# Altium PCB TinyTOF-Body.PcbDoc (part 2 of 3)
Units mil, origin at the board's own origin, x right, y up, seen from the top; angles counter-clockwise.
Board outline 6000 x 4000 mil, 6 copper layers (Component Side, Ground Plane (GND), Inner Layer 1, Inner Layer 2, Power Plane (VCC), Solder Side), stack 62.6 mil thick; 146 components, 158 nets, 1020 pads, 350 vias.
Unrouted connection lines stored in the file: 339.
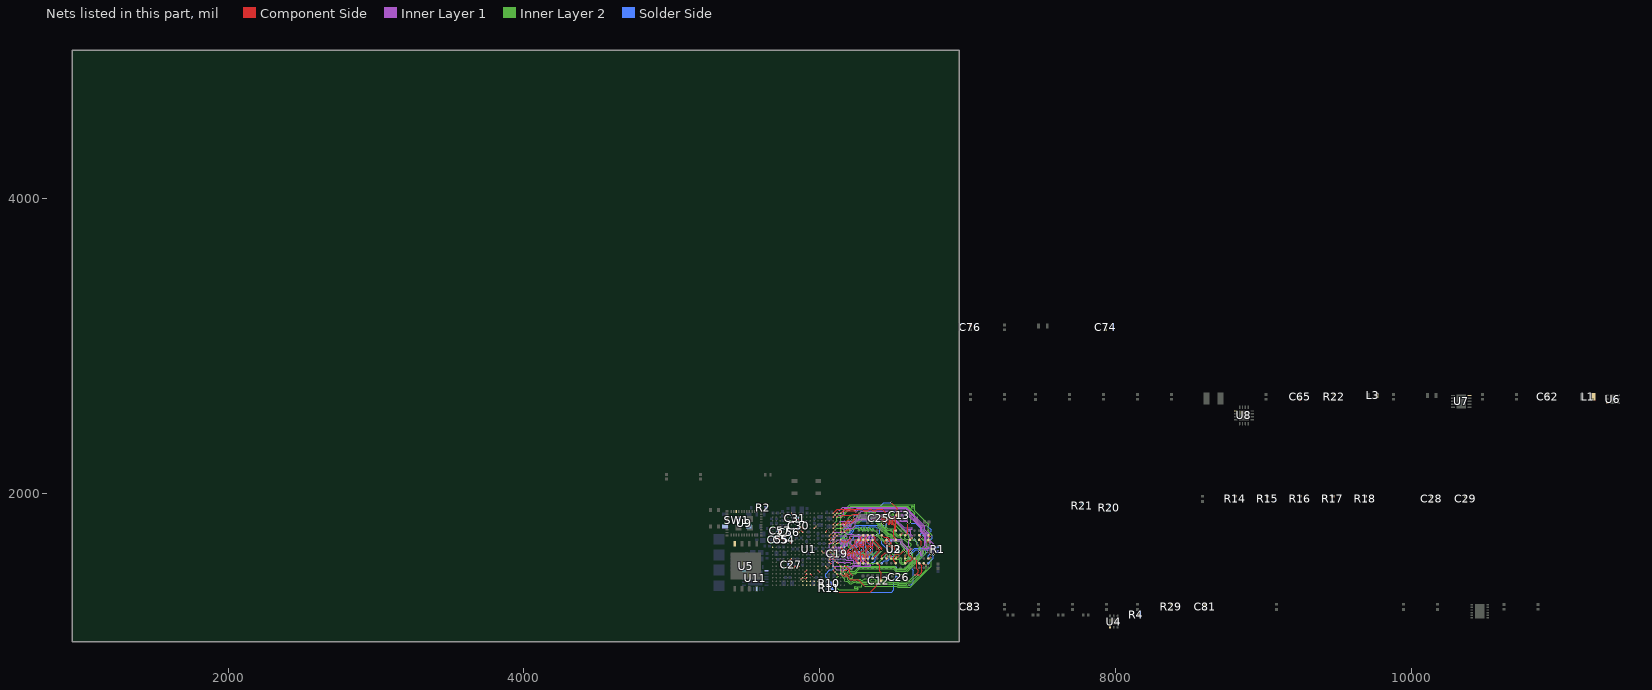
[diagram p6: the nets of this part, all layers, seen from the top]

## Via types
v1: diameter 12, hole 6, Component Side to Solder Side, tented both sides, 330 vias
v2: diameter 19.68, hole 7.87, Component Side to Solder Side, 12 vias
v3: diameter 19.68, hole 11.81, Component Side to Solder Side, 5 vias
v4: diameter 12, hole 6, Component Side to Solder Side, 3 vias

## Nets (pads, with @x,y where several pads share a name; then routed paths per layer and width w, separated by ;. In a path a pad name is that pad's centre, name@x,y a point inside that pad or via, vN(x,y) a via of type N, cw(c..) or ccw(c..) an arc to the next point about the centre after c; other vN are vias at no path point) (continued)
2V5: C54.2 C55.2 U1.K7 U1.N17 U1.N18 | length 54.3
  Component Side w5: v1(5720.27,1701.77) U1.N18@5733.07,1688.98 ; v1(5745.87,1701.77) U1.N17@5758.66,1688.98 ; U1.K7@6014.57,1612.2 v1(6027.36,1599.41)
3V3: C56.2 C57.2 C62.2 C76.2 L1.2 R2.2 R4.2 R22.2 SW1.1 SW1.2 U1.P17 U1.P18 U1.R18 U4.1 U6.3 U8.13 U9.30 | length 54.3
  Component Side w5: v1(5720.27,1727.36) U1.P18@5733.07,1714.57 ; v1(5720.27,1752.95) U1.R18@5733.07,1740.16 ; v1(5745.87,1727.36) U1.P17@5758.66,1714.57
3V3_SLOW: C27.2 C28.2 C29.2 C30.2 C31.2 C65.1 C74.1 C81.2 C83.2 L3.2 R14.2 R15.2 R16.2 R17.2 R18.2 R20.2 R21.2 R29.2 U1.E11 U1.F6 U1.F8 U1.F13 U1.F14 U1.F15 U1.G15 U1.H15 U1.L20 U1.M15 U1.N19 U1.R6 U1.R12 U1.R13 U1.T9 U1.T12 U1.V13 U1.Y15 U5.8 U7.10 U9.36 U11.1 U11.9 U11.18 | length 253.3
  Component Side w5: v1(5797.05,1497.05) U1.F15@5809.84,1509.84 ; v1(5797.05,1522.64) U1.G15@5809.84,1535.43 ; v1(5797.05,1548.23) U1.H15@5809.84,1561.02 ; v1(5797.05,1676.18) U1.M15@5809.84,1663.39 ; v1(5822.64,1497.05) U1.F14@5835.43,1509.84 ; v1(5848.23,1497.05) U1.F13@5861.02,1509.84 ; v1(5848.23,1752.95) U1.R13@5861.02,1740.16 ; v1(5848.23,1829.73) U1.V13@5861.02,1816.93 ; v1(5873.82,1752.95) U1.R12@5886.61,1740.16 ; v1(5873.82,1778.54) U1.T12@5886.61,1765.75 ; v1(5899.41,1471.46) U1.E11@5912.2,1484.25 ; U1.T9@5963.39,1765.75 v1(5976.18,1778.54) ; U1.F6@6040.16,1509.84 v1(6052.95,1497.05) ; U1.R6@6040.16,1740.16 v1(6052.95,1752.95)
CSI_D0: U1.D10 | length 18.1
  Component Side w5: U1.D10@5937.8,1458.66 v1(5950.59,1445.87)
CSI_D1: U1.B8
CSI_D2: U1.C11 | length 18.1
  Component Side w5: v1(5899.41,1420.27) U1.C11@5912.2,1433.07
CSI_D3: U1.A9
CSI_D4: U1.A11
CSI_D5: U1.D11 | length 18.1
  Component Side w5: v1(5899.41,1445.87) U1.D11@5912.2,1458.66
CSI_D6: U1.B9
CSI_D7: U1.A12
CSI_D8: U1.A10
CSI_D9: U1.C12 | length 18.1
  Component Side w5: v1(5873.82,1420.27) U1.C12@5886.61,1433.07
CSI_D10: U1.E8 | length 18.1
  Component Side w5: U1.E8@5988.98,1484.25 v1(6001.77,1471.46)
CSI_D11: U1.A7
CSI_HSYNC: U1.B12
CSI_PIXCLK: U1.B11
CSI_VSYNC: U1.B10
DDR_VREF: C12.2 C13.2 C19.2 C25.2 C26.2 R10.1 R11.2 U1.K4 U2.H1 U2.M8 U3.H1 U3.M8 | length 2425.8
  Component Side w5: U1.K4@6091.34,1612.2 v1(6104.13,1599.41) ; v4(6110,1335) 6341.14,1335 C12.2@6416.14,1410 6416.14,1466.18 6406.49,1475.83 6406.49,1513.78 U2.M8@6389.76,1530.51 ; v4(6485,1940) 6523.86,1901.14 C13.2@6523.86,1855 6515.75,1846.89 6515.75,1785.41 6516.5,1784.66 6516.5,1751.74 U2.H1@6515.75,1750.98
  Solder Side w5: U3.M8@6389.76,1719.49 6406.49,1736.22 6406.49,1757.1 6424.14,1774.75 6442.43,1774.75 6453.5,1785.82 6453.5,1802.64 6437.28,1818.86 C25.2@6400,1818.86 6313.86,1818.86 ; v4(6485,1940) 6435,1940 6313.86,1818.86 ; U3.H1@6515.75,1499.02 6519,1495.76 6519,1435.14 C26.2@6518.86,1435 6502.5,1418.64 6502.5,1349.82 6487.68,1335 v4(6110,1335) 6085,1360 R11.2@6082.72,1360 R10.1@6082.72,1395 6040,1437.72 6040,1455 6069.55,1484.55 6083.72,1484.55 6091.04,1491.87 6091.04,1582.19 C19.2@6103.86,1595 6121.53,1612.67 6134.27,1612.67 6145,1623.41 6145,1722.68 6241.18,1818.86 6313.86,1818.86
DRAM_A0: U1.N5 U2.N3 U3.N3 | length 623.1
  Component Side w5: U1.N5@6065.75,1688.98 v1(6078.54,1701.77) ; U2.N3@6358.27,1687.99 6358.27,1669.46 6360.36,1667.36 6390,1637.73 v1(6390,1615)
  Inner Layer 2 w5: v1(6078.54,1701.77) 6091.63,1688.68 6091.63,1620.27 ccw(c6100,1620.27) 6100,1611.91 ccw(c6100,1616.91) 6105,1616.91 6105,1633.09 cw(c6110,1633.09) 6110,1638.09 cw(c6110,1633.09) 6115,1633.09 6115,1616.91 ccw(c6120,1616.91) 6120,1611.91 6134.9,1611.91 6146.81,1600 6295.32,1600 6300,1595.32 6320,1595.32 6324.68,1600 6350,1600 6354.68,1595.32 6370.32,1595.32 v1(6390,1615)
  Solder Side w5: U3.N3@6358.27,1562.01 6358.27,1583.27 v1(6390,1615)
DRAM_A1: U1.P5 U2.P7 U3.P7 | length 648.2
  Component Side w5: U1.P5@6065.75,1714.57 v1(6078.54,1727.36) ; U2.P7@6326.77,1562.01 6326.77,1581.77 v1(6360,1615)
  Inner Layer 1 w5: v1(6078.54,1727.36) 6091.18,1740 6173.92,1740 6187.42,1726.5 6226.23,1726.5 6231.23,1721.5 6323.5,1721.5 cw(c6323.5,1715) 6330,1715 6330,1705 ccw(c6335,1705) 6335,1700 ccw(c6335,1705) 6340,1705 6340,1715 cw(c6345,1715) 6345,1720 cw(c6345,1715) 6350,1715 6350,1705 ccw(c6355,1705) 6355,1700 ccw(c6355,1705) 6360,1705 6360,1715 cw(c6365,1715) 6365,1720 cw(c6365,1715) 6370,1715 6370,1695 cw(c6365,1695) 6365,1690 ccw(c6365,1685) 6360,1685 v1(6360,1615)
  Solder Side w5: U3.P7@6326.77,1687.99 6326.77,1668.23 6360,1635 v1(6360,1615)
DRAM_A2: U1.M4 U2.P3 U3.P3 | length 649.3
  Component Side w5: U1.M4@6091.34,1663.39 v1(6104.13,1676.18) ; U2.P3@6326.77,1687.99 6320,1681.22 6320,1675 6325,1670 6345,1670 6350,1665 6350,1660 6345,1655 6335,1655 6330,1650 6330,1647.73 6332.73,1645 6355,1645 6360,1640 6360,1635 6355,1630 v1(6345,1630)
  Inner Layer 1 w5: v1(6104.13,1676.18) 6107.63,1679.68 6117.23,1679.68 6117.23,1681.36 6124.55,1688.68 6196.36,1688.68 6204.82,1697.14 6204.82,1710.18 6212.14,1717.5 6222.5,1717.5 6227.5,1712.5 6312.5,1712.5 cw(c6312.5,1705) 6320,1705 cw(c6315,1705) 6315,1700 6310,1700 ccw(c6310,1695) 6305,1695 ccw(c6310,1695) 6310,1690 6340,1690 cw(c6340,1685) 6345,1685 v1(6345,1630)
  Solder Side w5: U3.P3@6326.77,1562.01 6332.01,1562.01 6340,1570 6340,1575 6325,1590 6325,1595 6330,1600 6335,1600 6345,1590 6350,1590 6355,1595 6355,1600 6345,1610 v1(6345,1630)
DRAM_A3: U1.K5 U2.N2 U3.N2 | length 622.4
  Component Side w5: U1.K5@6065.75,1612.2 v1(6078.54,1599.41) ; U2.N2@6358.27,1719.49 6375,1702.76 6375,1694.12 6375,1677.28 6409.77,1642.5 6410.18,1642.5 6417.5,1635.18 6417.5,1634.77 6420,1632.27 v1(6420,1615)
  Inner Layer 2 w5: v1(6078.54,1599.41) 6091.63,1586.32 6358.68,1586.32 6365,1580 6385,1580 v1(6420,1615)
  Solder Side w5: U3.N2@6358.27,1530.51 6375,1547.24 6375,1568.12 6420,1613.13 v1(6420,1615)
DRAM_A4: U1.H5 U2.P8 U3.P8 | length 655.9
  Component Side w5: U1.H5@6065.75,1561.02 v1(6078.54,1548.23) ; v1(6315,1630) 6315,1585 6310,1580 6310,1568.17 6310.04,1568.12 6310.04,1547.24 U2.P8@6326.77,1530.51
  Inner Layer 1 w5: v1(6078.54,1548.23) 6091.63,1535.14 6091.63,1513.37 6095,1510 6220,1510 6220.14,1510.14 ; 6220.18,1510.14 6227.5,1517.46 6272.46,1517.46 ccw(c6272.46,1525) 6280,1525 6280,1565 cw(c6285,1565) 6285,1570 cw(c6285,1565) 6290,1565 6290,1540 ccw(c6295,1540) 6295,1535 ccw(c6295,1540) 6300,1540 6300,1555 cw(c6305,1555) 6305,1560 ccw(c6305,1570) 6315,1570 v1(6315,1630)
  Solder Side w5: v1(6315,1630) 6312,1633 6312,1704.72 U3.P8@6326.77,1719.49
DRAM_A5: U1.F4 U2.P2 U3.P2 | length 653.6
  Component Side w5: U1.F4@6091.34,1509.84 v1(6104.13,1497.05) ; U2.P2@6326.77,1719.49 6310.04,1702.76 6310.04,1654.96 6330,1635 v1(6330,1615)
  Inner Layer 1 w5: v1(6104.13,1497.05) 6116.63,1484.55 6176.87,1484.55 6184.82,1492.5 6217.5,1492.5 6233.46,1508.46 6338.46,1508.46 ccw(c6338.46,1515) 6345,1515 ccw(c6340,1515) 6340,1520 6310,1520 cw(c6310,1525) 6305,1525 cw(c6310,1525) 6310,1530 6325,1530 ccw(c6325,1535) 6330,1535 v1(6330,1615)
  Solder Side w5: U3.P2@6326.77,1530.51 6310.04,1547.24 6310.04,1568.12 6310,1568.17 6310,1595 v1(6330,1615)
DRAM_A6: U1.N4 U2.R8 U3.R8 | length 653.7
  Component Side w5: U1.N4@6091.34,1688.98 v1(6104.13,1701.77) ; v1(6255,1630) 6255,1612.32 6250,1607.32 6250,1602.73 6257.73,1595 6265,1595 6278.55,1581.45 6278.55,1547.24 U2.R8@6295.28,1530.51
  Inner Layer 1 w5: v1(6104.13,1701.77) 6104.13,1693.86 6091.04,1680.77 6091.04,1671 6083.72,1663.68 6073.96,1663.68 6065.45,1655.18 6065.45,1634.55 6075,1625 6080,1625 ccw(c6080,1630) 6085,1630 6085,1635 cw(c6090,1635) 6090,1640 6091.04,1640 cw(c6091.04,1636.04) 6095,1636.04 6095,1630 ccw(c6100,1630) 6100,1625 ccw(c6100,1630) 6105,1630 6105,1633.09 cw(c6110,1633.09) 6110,1638.09 cw(c6110,1633.09) 6115,1633.09 6115,1630 ccw(c6120,1630) 6120,1625 ccw(c6120,1630) 6125,1630 6125,1633.09 cw(c6130,1633.09) 6130,1638.09 cw(c6130,1633.09) 6135,1633.09 6135,1630 ccw(c6140,1630) 6140,1625 ccw(c6140,1630) 6145,1630 6145,1635 cw(c6150,1635) 6150,1640 cw(c6150,1635) 6155,1635 6155,1627.32 6174.82,1607.5 6185.18,1607.5 6197.5,1619.82 6197.5,1620.18 6219.82,1642.5 6242.5,1642.5 v1(6255,1630)
  Solder Side w5: v1(6255,1630) 6245,1640 6245,1645 6250,1650 6250,1666.45 6256.78,1673.22 6269.9,1673.22 6280,1683.33 6280,1704.21 U3.R8@6295.28,1719.49
DRAM_A7: U1.G5 U2.R2 U3.R2 | length 647.3
  Component Side w5: U1.G5@6065.75,1535.43 v1(6078.54,1522.64) ; v1(6270,1615) 6270,1635 6255,1650 6255,1658.33 6280,1683.33 6280,1704.21 U2.R2@6295.28,1719.49
  Inner Layer 1 w5: v1(6078.54,1522.64) 6065.45,1535.73 6065.45,1552.81 6073.37,1560.73 6169.27,1560.73 6180,1550 6225,1550 cw(c6225,1545) 6230,1545 6230,1531.46 ccw(c6235,1531.46) 6235,1526.46 ; 6236.46,1526.46 6235,1526.46 ; v1(6270,1615) 6270,1580 cw(c6260,1580) 6260,1570 6255,1570 ccw(c6255,1565) 6250,1565 ccw(c6255,1565) 6255,1560 cw(c6255,1555) 6260,1555 6260,1531.46 cw(c6255,1531.46) 6255,1526.46 cw(c6255,1531.46) 6250,1531.46 6250,1545 ccw(c6245,1545) 6245,1550 ccw(c6245,1545) 6240,1545 6240,1531.46 cw(c6235,1531.46) 6235,1526.46
  Solder Side w5: v1(6270,1615) 6265,1610 6265,1590 6280,1575 6280,1550 6295.28,1534.72 U3.R2@6295.28,1530.51
DRAM_A8: U1.J4 U2.T8 U3.T8 | length 650.6
  Component Side w5: U1.J4@6091.34,1586.61 v1(6104.13,1573.82) ; v1(6210,1615) 6185,1590 6185,1585 6190,1580 6195,1580 6215,1600 6220,1600 6225,1595 6225,1590 6220,1585 6220,1574.29 U2.T8@6263.78,1530.51 U2.T8@6263.78,1536.22
  Inner Layer 1 w5: v1(6104.13,1573.82) 6093.09,1573.82 cw(c6093.09,1581.91) 6085,1581.91 ccw(c6080,1581.91) 6080,1586.91 ccw(c6080,1581.91) 6075,1581.91 6075,1575 cw(c6070,1575) 6070,1570 cw(c6070,1574.55) 6065.45,1574.55 6065.45,1580.86 ccw(c6060,1580.86) 6060,1586.32 6045,1586.32 cw(c6045,1591.32) 6040,1591.32 6040,1610 cw(c6045,1610) 6045,1615 6152.27,1615 6168.77,1598.5 6193.5,1598.5 v1(6210,1615)
  Solder Side w5: v1(6210,1615) 6210,1637.5 6210.18,1637.5 6217.5,1644.82 6217.5,1655.18 6210.18,1662.5 6210,1662.5 6210,1680 6232.5,1702.5 6232.5,1707.68 6244.82,1720 6263.27,1720 U3.T8@6263.78,1719.49
DRAM_A9: U1.L2 U2.R3 U3.R3 | length 636.1
  Component Side w5: U1.L2@6142.52,1637.8 6155.31,1625 6155.31,1604.69 6160,1600 6182.27,1600 6192.5,1610.23 6192.5,1617.5 6220,1645 6220,1650 6215,1655 6210,1655 v1(6205,1650) ; v1(6285,1630) 6295,1630 6300,1635 6300,1640 6295,1645 6275,1645 6270,1650 6270,1655 6275,1660 6290,1660 6295.28,1665.28 U2.R3@6295.28,1687.99
  Inner Layer 1 w5: v1(6205,1650) 6206.5,1651.5 6236.5,1651.5 ccw(c6236.5,1655) 6240,1655 6240,1673.5 cw(c6245,1673.5) 6245,1678.5 cw(c6245,1673.5) 6250,1673.5 6250,1650 ccw(c6255,1650) 6255,1645 ccw(c6255,1650) 6260,1650 6260,1672.55 cw(c6265,1672.55) 6265,1677.55 cw(c6265,1672.55) 6270,1672.55 6270,1650 ccw(c6275,1650) 6275,1645 ccw(c6275,1650) 6280,1650 6280,1670 cw(c6285,1670) 6285,1675 cw(c6285,1670) 6290,1670 6290,1635 cw(c6285,1635) v1(6285,1630)
  Solder Side w5: v1(6285,1630) 6285,1612.32 6276.34,1603.66 6276.34,1598.66 6280,1595 6285,1595 6290,1600 6295,1600 6300,1595 6300,1590 6289,1579 6289,1568.28 U3.R3@6295.28,1562.01
DRAM_A10: U1.H4 U2.L7 U3.L7 | length 624.8
  Component Side w5: U1.H4@6091.34,1561.02 v1(6104.13,1548.23) ; U2.L7@6421.26,1562.01 6421.26,1581.26 6442.5,1602.5 6455.18,1602.5 6465,1612.32 v1(6465,1625)
  Inner Layer 1 w5: v1(6104.13,1548.23) 6117.23,1535.14 6160.49,1535.14 6165.63,1530 6175,1530 6180.14,1535.14 6202.5,1535.14 v1(6215,1522.64)
  Inner Layer 2 w5: v1(6215,1522.64) 6220.86,1528.5 6393.5,1528.5 6465,1600 v1(6465,1625)
  Solder Side w5: U3.L7@6421.26,1687.99 6421.26,1661.42 6457.68,1625 v1(6465,1625)
DRAM_A11: U1.M3 U2.R7 U3.R7 | length 655.7
  Component Side w5: U1.M3@6116.93,1663.39 v1(6129.73,1676.18) ; U2.R7@6295.28,1562.01 6300,1566.73 6300,1585 6295,1590 6285,1590 6280,1595 6280,1605 6290,1615 v1(6300,1615)
  Inner Layer 1 w5: v1@6130.91,1675 v1(6129.73,1676.18) 6133.82,1676.18 cw(c6133.82,1670) 6140,1670 6140,1665 ccw(c6145,1665) 6145,1660 ccw(c6145,1665) 6150,1665 6150,1673.5 cw(c6155,1673.5) 6155,1678.5 cw(c6155,1673.5) 6160,1673.5 6160,1650 ccw(c6165,1650) 6165,1645 ccw(c6165,1650) 6170,1650 6170,1673.5 cw(c6175,1673.5) 6175,1678.5 cw(c6175,1673.5) 6180,1673.5 6180,1654.5 ccw(c6185,1654.5) 6185,1649.5 ccw(c6185,1654.5) 6190,1654.5 6190,1673.5 cw(c6195,1673.5) 6195,1678.5 cw(c6195,1673.5) 6200,1673.5 6200,1667.5 ccw(c6205,1667.5) 6205,1662.5 ccw(c6205,1667.5) 6210,1667.5 6210,1680 cw(c6217.5,1680) 6217.5,1687.5 6253.75,1687.5 ccw(c6253.75,1693.75) 6260,1693.75 6260,1698.5 cw(c6265,1698.5) 6265,1703.5 cw(c6265,1698.5) 6270,1698.5 6270,1690.09 ccw(c6275.09,1690.09) 6275.09,1685 ccw(c6275.09,1689.91) 6280,1689.91 6280,1698.5 cw(c6285,1698.5) 6285,1703.5 cw(c6285,1698.5) 6290,1698.5 6290,1690 6300,1680 v1(6300,1615)
  Solder Side w5: U3.R7@6295.28,1687.99 6295.28,1680.28 6275,1660 6275,1650 6280,1645 6290,1645 6300,1635 v1(6300,1615)
DRAM_A12: U1.M5 U2.N7 U3.N7 | length 638.5
  Component Side w5: U1.M5@6065.75,1663.39 v1(6078.54,1676.18) ; U2.N7@6358.27,1562.01 6358.27,1563.27 6405,1610 v1(6405,1630)
  Inner Layer 1 w5: v1(6078.54,1676.18) 6078.54,1684.09 6091.04,1696.59 6091.04,1706.36 6099.55,1714.86 6134.9,1714.86 6135.04,1715 6175,1715 v1(6185,1705)
  Inner Layer 2 w5: v1(6185,1705) 6185,1695 6192.5,1687.5 6247.5,1687.5 cw(c6247.5,1680) 6255,1680 ccw(c6260,1680) 6260,1675 ccw(c6260,1680) 6265,1680 6265,1685 cw(c6270,1685) 6270,1690 cw(c6270,1685) 6275,1685 6275,1680 ccw(c6280,1680) 6280,1675 ccw(c6280,1680) 6285,1680 6285,1685 cw(c6290,1685) 6290,1690 cw(c6290,1685) 6295,1685 6295,1680 ccw(c6300,1680) 6300,1675 ccw(c6300,1680) 6305,1680 6305,1685 cw(c6310,1685) 6310,1690 6345,1690 v1(6405,1630)
  Solder Side w5: U3.N7@6358.27,1687.99 6358.27,1676.73 v1(6405,1630)
DRAM_A13: U1.J3 U2.T3 U3.T3 | length 634.5
  Component Side w5: U1.J3@6116.93,1586.61 v1(6129.73,1573.82) ; v1(6240,1615) 6240,1635 6230,1645 6230,1655 6240,1665 6240,1677.32 6252.68,1690 6261.77,1690 U2.T3@6263.78,1687.99
  Inner Layer 1 w5: v1(6129.73,1573.82) 6145,1589.09 6145,1595 cw(c6150,1595) 6150,1600 cw(c6150,1595) 6155,1595 6155,1590 ccw(c6158.68,1590) 6158.68,1586.32 6165,1586.32 cw(c6165,1581.32) 6170,1581.32 6170,1575 ccw(c6175,1575) 6180,1575 ; 6175,1570 ccw(c6175,1575) 6180,1575 ; v1(6240,1615) 6240,1610 ccw(c6245,1610) 6245,1605 6255,1605 cw(c6255,1600) 6260,1600 cw(c6255,1600) 6255,1595 6245,1595 ccw(c6245,1590) 6240,1590 6240,1565 cw(c6235,1565) 6235,1560 cw(c6235,1565) 6230,1565 6230,1590 ccw(c6225,1590) 6225,1595 ccw(c6225,1590) 6220,1590 6220,1565 cw(c6215,1565) 6215,1560 cw(c6215,1565) 6210,1565 6210,1590 ccw(c6205,1590) 6205,1595 ccw(c6205,1590) 6200,1590 6200,1565 cw(c6195,1565) 6195,1560 cw(c6195,1565) 6190,1565 6190,1584 ccw(c6184.5,1584) 6184.5,1589.5 ccw(c6184.5,1585) 6180,1585 6180,1575
  Solder Side w5: v1(6240,1615) 6230,1605 6230,1595 6235,1590 6250,1590 6255,1585 6255,1580 6240,1565 6240,1560 6245,1555 6256.77,1555 U3.T3@6263.78,1562.01
DRAM_A14: U1.R1 U2.T7 U3.T7 | length 624.1
  Component Side w5: U1.R1@6168.11,1740.16 6168.27,1740 6183.27,1755 v1(6205,1755) ; v1(6225,1630) 6225,1610 6240,1595 6240,1575 6251.77,1563.23 6265,1563.23 U2.T7@6263.78,1562.01
  Inner Layer 2 w5: v1(6205,1755) 6205,1745 6165,1705 6165,1700 ccw(c6170,1700) 6170,1695 cw(c6170,1690) 6175,1690 cw(c6170,1690) 6170,1685 ccw(c6170,1680) 6165,1680 ccw(c6170,1680) 6170,1675 6207.5,1675 cw(c6207.5,1670) 6212.5,1670 cw(c6207.5,1670) 6207.5,1665 6155,1665 ccw(c6155,1660) 6150,1660 6150,1615 ccw(c6155,1615) 6155,1610 ccw(c6155,1615) 6160,1615 6160,1650 cw(c6165,1650) 6165,1655 6187,1655 cw(c6187,1649.5) 6192.5,1649.5 6192.5,1640 ccw(c6205,1640) 6192.5,1639.82 6202.32,1630 v1(6225,1630)
  Solder Side w5: v1(6225,1630) 6226.5,1631.5 6226.5,1651.5 6240,1665 6240,1680 6247.5,1687.5 6263.29,1687.5 U3.T7@6263.78,1687.99
DRAM_CAS: U1.N2 U2.K3 U3.K3 | length 622.6
  Component Side w5: U1.N2@6142.52,1688.98 6156.5,1675 6186.87,1675 6216.87,1705 v1(6217.32,1705) ; U2.K3@6452.76,1687.99 6442.78,1678.01 6442.78,1664.55 6449.82,1657.5 6460.82,1646.5 6475.77,1646.5 6489.95,1632.32 6495,1632.32 v1(6495,1630)
  Inner Layer 2 w5: v1(6217.32,1705) 6232.32,1720 6290,1720 6300,1710 6310,1710 6320,1720 6387.32,1720 6459.82,1647.5 6472.91,1647.5 6490.41,1630 v1(6495,1630)
  Solder Side w5: U3.K3@6452.76,1562.01 6445,1569.76 6445,1584.14 6454.36,1593.5 6458.91,1593.5 6467.91,1602.5 6485.18,1602.5 6495,1612.32 v1(6495,1630)
DRAM_CLK_N: R1.2 U1.L1 U2.K7 U3.K7 | length 1468
  Component Side w5: U1.L1@6168.11,1637.8 6179.53,1637.8 v1(6180.32,1637) ; U2.K7@6452.76,1562.01 6452.76,1570.08 v1(6461.64,1578.96)
  Inner Layer 1 w5: v1(6455.28,1669.72) 6478.05,1692.5 6542.5,1692.5 6552.5,1692.5 6557.5,1687.5 6557.5,1667.5 6610,1615 v1(6615,1610)
  Inner Layer 2 w5: v1@6440,1787.32 v1(6440,1790) 6442.5,1790 6452.5,1780 6452.5,1772.55 6462.55,1762.5 6497.5,1762.5 6510,1750 6510,1739.14 6529.14,1720 6535,1720 6545,1730 6550,1730 6555,1725 6555.08,1725 6557.58,1722.5 6572.5,1722.5 6577.5,1717.5 6577.5,1702.02 6577.5,1699.74 6584.82,1692.41 6597.59,1692.41 6607.26,1682.74 6607.26,1672.26 6620,1659.52 6620,1653.18 6606.5,1639.68 6606.5,1618.5 v1(6615,1610) 6615,1609.09 6631,1593.09 6631,1574.64 6578.86,1522.5 6555.68,1522.5 6542.5,1535.68 6542.5,1550.18 6535.18,1557.5 6483.1,1557.5 v1(6461.64,1578.96)
  Solder Side w5: v1(6180.32,1637) 6170,1647.32 6170,1709.09 6190.58,1729.67 6191.62,1730.7 6212.52,1730.7 6232.5,1750.68 6232.5,1760.18 6249.82,1777.5 6260,1777.5 6267.5,1770 6280,1770 6287.5,1777.5 6310,1777.5 6317.5,1770 6330,1770 6337.5,1777.5 6377.5,1777.5 6385,1770 6397.5,1770 6413.66,1786.16 6436.16,1786.16 v1(6440,1790) ; U3.K7@6452.76,1687.99 6452.76,1672.24 v1(6455.28,1669.72) ; v1(6615,1610) 6622.68,1610 6645.18,1632.5 6767.5,1632.5 6770,1635 6780,1635 6782.5,1632.5 6789.78,1632.5 R1.2@6800,1642.72
DRAM_CLK_P: R1.1 U1.K1 U2.J7 U3.J7 | length 1471
  Component Side w5: U1.K1@6168.11,1612.76 U1.K1@6168.11,1612.2 6172.2,1612.2 v1(6180,1620) ; v1(6475,1590) 6484.25,1580.75 U2.J7@6484.25,1562.01
  Inner Layer 1 w5: v1(6470,1660) 6492.5,1682.5 6538.36,1682.5 6540.18,1682.5 6547.5,1675.18 6547.5,1663.36 6600,1610.86 6600,1605 v1(6615,1590)
  Inner Layer 2 w5: v1(6425,1799.66) 6425,1785.91 6458.41,1752.5 6482.5,1752.5 6525,1710 6542.32,1710 6559.82,1692.5 6570.18,1692.5 6570.39,1692.71 6580.68,1682.41 6582.96,1682.41 6602.5,1662.88 6602.5,1649.82 6596.5,1643.82 6596.5,1608.5 v1(6615,1590) 6617.6,1590 6621.3,1586.3 6621.3,1579.08 6592.22,1550 6580,1550 6577.5,1547.5 6577.5,1535.28 6574.72,1532.5 6559.82,1532.5 6552.5,1539.82 6552.5,1550.18 6556.16,1553.84 6556.16,1563.84 6553.31,1566.69 6529.82,1566.69 6516.51,1580 6510,1580 6496.69,1566.69 6488.31,1566.69 6475.14,1579.86 v1@6475.14,1584.55 ; v1@6475,1584.69 v1(6475,1590)
  Solder Side w5: v1(6180,1620) 6178.23,1620 6160,1638.23 6160,1713.23 6187.48,1740.7 6208.38,1740.7 6222.5,1754.82 6222.5,1764.32 6245.68,1787.5 6400.86,1787.5 6409.52,1796.16 6421.16,1796.16 6424.66,1799.66 v1(6425,1799.66) ; v1(6470,1660) 6484.25,1674.25 U3.J7@6484.25,1687.99 ; v1(6615,1590) 6616.82,1590 6649.32,1622.5 6784.78,1622.5 R1.1@6800,1607.28
DRAM_CS: U1.L4 U2.L2 U3.L2 | length 1059.3
  Component Side w5: U1.L4@6091.34,1637.8 v1(6104.13,1650.59) ; U2.L2@6421.26,1719.49 6436.03,1704.72 6456.91,1704.72 6469.48,1692.15 6469.48,1678.19 6485.03,1662.65 6485.03,1649.97 6489.97,1645.03 6502.65,1645.03 6510,1637.68 v1(6510,1615)
  Inner Layer 2 w5: v1(6104.13,1650.59) 6117.23,1663.68 6135.81,1663.68 ccw(c6135.81,1670.09) 6142.23,1670.09 cw(c6147.13,1670.09) 6147.13,1675 6150,1675 ccw(c6150,1680) 6155,1680 ccw(c6150,1680) 6150,1685 6144.27,1685 cw(c6144.27,1689.27) 6140,1689.27 cw(c6145.73,1689.27) 6145.73,1695 6150,1695 ccw(c6150,1700) 6155,1700 6155.26,1700.26 6155.26,1707.99 6187.5,1740.23 6187.5,1755.18 6199.82,1767.5 6212.09,1767.5 6219.59,1760 6232.32,1760 6239.82,1767.5 6257.5,1767.5 cw(c6257.5,1760) 6265,1760 6265,1755 ccw(c6270,1755) 6270,1750 ccw(c6270,1755) 6275,1755 6275,1762.5 cw(c6280,1762.5) 6280,1767.5 cw(c6280,1762.5) 6285,1762.5 6285,1755 ccw(c6290,1755) 6290,1750 ccw(c6290,1755) 6295,1755 6295,1762.5 cw(c6300,1762.5) 6300,1767.5 cw(c6300,1762.5) 6305,1762.5 6305,1755 ccw(c6310,1755) 6310,1750 ccw(c6310,1755) 6315,1755 6315,1762.5 cw(c6320,1762.5) 6320,1767.5 cw(c6320,1762.5) 6325,1762.5 6325,1755 ccw(c6330,1755) 6330,1750 ccw(c6330,1755) 6335,1755 6335,1762.5 cw(c6340,1762.5) 6340,1767.5 cw(c6340,1762.5) 6345,1762.5 6345,1755 ccw(c6350,1755) 6350,1750 ccw(c6350,1755) 6355,1755 6355,1760 cw(c6360,1760) 6360,1765 cw(c6360,1760) 6365,1760 6365,1755 ccw(c6370,1755) 6370,1750 6377.68,1750 6395.03,1732.65 6395.03,1725.03 6402.53,1717.53 6410.15,1717.53 6420,1707.68 6420,1700.05 6437.83,1682.22 6465.45,1682.22 6485,1662.68 6485,1650 6490,1645 6502.68,1645 6510,1637.68 v1(6510,1615)
  Solder Side w5: U3.L2@6421.26,1530.51 6421.26,1531.26 6437.24,1547.24 6460.83,1547.24 6469.48,1555.89 6469.48,1568.12 6478.14,1576.78 6496.9,1576.78 6510,1589.87 v1(6510,1615)
DRAM_D0: U1.T2 U2.E3 | length 817.3
  Component Side w5: U1.T2@6142.52,1765.75 6155,1778.23 v1(6155,1780) ; U2.E3@6610.24,1687.99 6622.24,1700 v1(6625,1700)
  Inner Layer 1 w5: v1@6156.77,1780 v1(6155,1780) 6155,1792.5 cw(c6160,1792.5) 6160,1797.5 cw(c6160,1792.5) 6165,1792.5 6165,1781.5 ccw(c6170,1781.5) 6170,1776.5 ccw(c6170,1781.5) 6175,1781.5 6175,1795 cw(c6180,1795) 6180,1800 cw(c6180,1795) 6185,1795 6185,1781.5 ccw(c6190,1781.5) 6190,1776.5 ccw(c6190,1781.5) 6195,1781.5 6195,1798.5 cw(c6200,1798.5) 6200,1803.5 cw(c6200,1798.5) 6205,1798.5 6205,1781.5 ccw(c6210,1781.5) 6210,1776.5 ; 6211.5,1776.5 6210,1776.5 ; v1(6625,1700) 6625,1715.89 6615,1725.89 6615,1745 ccw(c6610,1745) 6610,1750 6595,1750 cw(c6595,1755) 6590,1755 cw(c6595,1755) 6595,1760 6622.5,1760 ccw(c6622.5,1765) 6627.5,1765 ccw(c6622.73,1765) 6622.73,1769.77 6571.12,1769.77 6508.39,1832.5 6257.91,1832.5 6228.91,1803.5 6220,1803.5 ccw(c6220,1798.5) 6215,1798.5 6215,1781.5 cw(c6210,1781.5) 6210,1776.5
DRAM_D1: U1.U2 U2.F7 | length 784.6
  Component Side w5: U1.U2@6142.52,1791.34 6156.69,1805.51 6174.37,1805.51 6193.86,1825 v1(6210,1825) ; U2.F7@6578.74,1562.01 6578.74,1582.74 v1(6581,1585)
  Inner Layer 2 w5: v1(6210,1825) 6245,1825 ccw(c6245,1830) 6250,1830 6250,1843.5 cw(c6255,1843.5) 6255,1848.5 cw(c6255,1843.5) 6260,1843.5 6260,1840 ccw(c6265,1840) 6265,1835 ccw(c6265,1840) 6270,1840 6270,1843.5 cw(c6275,1843.5) 6275,1848.5 cw(c6275,1843.63) 6279.87,1843.63 6279.87,1843 6369.73,1843 6389.23,1823.5 6426.5,1823.5 cw(c6426.5,1820) 6430,1820 cw(c6425,1820) 6425,1815 6417.5,1815 ccw(c6417.5,1810) 6412.5,1810 6412.5,1785.68 6467.18,1731 6480.32,1731 6519.82,1691.5 6543.91,1691.5 6556.5,1678.91 6556.5,1670.82 6587.5,1639.82 6587.5,1602.5 6600,1590 6600,1570.51 6589.49,1560 6585,1560 6581,1564 v1(6581,1585)
DRAM_D2: U1.U1 U2.F2 | length 803.7
  Component Side w5: U1.U1@6168.11,1791.34 6172.93,1791.34 6186.59,1805 6215,1805 6235,1825 v1(6235,1840) ; U2.F2@6578.74,1719.49 6595,1735.75 v1(6595,1800)
  Inner Layer 1 w5: v1(6235,1840) 6235,1850 6242.5,1857.5 6472.5,1857.5 6485,1845 6505,1845 6517.5,1857.5 6562.5,1857.5 cw(c6562.5,1850) 6570,1850 cw(c6565,1850) 6565,1845 6525,1845 ccw(c6525,1840) 6520,1840 ccw(c6525,1840) 6525,1835 6590,1835 cw(c6590,1830) 6595,1830 cw(c6590,1830) 6590,1825 6550,1825 ccw(c6550,1820) 6545,1820 ccw(c6550,1820) 6550,1815 6590,1815 cw(c6590,1810) 6595,1810 v1(6595,1800)
DRAM_D3: U1.R2 U2.F8 | length 815.5
  Component Side w5: U1.R2@6142.52,1740.16 v1(6155.32,1752.95) ; U2.F8@6578.74,1530.51 6595.47,1547.24 6616.35,1547.24 6625,1555.89 6625,1568.12 6616.35,1576.78 6608.2,1576.78 6602.5,1582.47 6602.5,1593.91 6602.5,1617.5 6611,1626 v1(6621,1626)
  Inner Layer 1 w5: v1(6155.32,1752.95) 6169.86,1767.5 6225.18,1767.5 6242.5,1784.82 6242.5,1802.5 6263.5,1823.5 6504.66,1823.5 6612.5,1715.66 6612.5,1712.43 6612.5,1694.61 6602.5,1684.61 6602.5,1644.5 v1(6621,1626)
DRAM_D4: U1.U3 U2.H3 | length 818.6
  Component Side w5: U1.U3@6116.93,1791.34 v1(6129.73,1804.13) ; v1(6425,1845) 6425,1817.5 ccw(c6430,1817.5) 6430,1812.5 ccw(c6430,1817.5) 6435,1817.5 6435,1825 cw(c6440,1825) 6440,1830 cw(c6440,1825) 6445,1825 6445,1810 ccw(c6450,1810) 6450,1805 ccw(c6450,1810) 6455,1810 6455,1825 cw(c6460,1825) 6460,1830 cw(c6460,1825) 6465,1825 6465,1797.5 ccw(c6470,1797.5) 6470,1792.5 ccw(c6470,1797.5) 6475,1797.5 6475,1835 cw(c6480,1835) 6480,1840 cw(c6480,1835) 6485,1835 6485,1797.5 ccw(c6490,1797.5) 6490,1792.5 ccw(c6490,1797.5) 6495,1797.5 6495,1835 cw(c6500,1835) 6500,1840 cw(c6500,1835) 6505,1835 6505,1782.68 6507.5,1780.18 6507.5,1763.62 6500,1756.12 6500,1707.73 6515.75,1691.98 U2.H3@6515.75,1687.99
  Inner Layer 1 w5: v1(6129.73,1804.13) 6138.09,1812.5 6225.18,1812.5 6257.68,1845 v1(6425,1845)
DRAM_D5: U1.R4 U2.G2 | length 787.3
  Component Side w5: U1.R4@6091.34,1740.16 v1(6104.13,1752.95) ; U2.G2@6547.24,1719.49 v1(6562.76,1735)
  Inner Layer 2 w5: v1(6104.13,1752.95) 6117.23,1766.04 6134.9,1766.04 6142.23,1773.37 6142.23,1784.9 6149.82,1792.5 6172.5,1792.5 6193.41,1813.41 6193.41,1833.41 6217.5,1857.5 6302.5,1857.5 ccw(c6302.5,1865) 6310,1865 6310,1874 cw(c6315,1874) 6315,1879 cw(c6315,1874) 6320,1874 6320,1857 ccw(c6325,1857) 6325,1852 ccw(c6325,1857) 6330,1857 6330,1874 cw(c6335,1874) 6335,1879 cw(c6335,1874) 6340,1874 6340,1857 ccw(c6345,1857) 6345,1852 ccw(c6345,1857) 6350,1857 6350,1874 cw(c6355,1874) 6355,1879 cw(c6355,1874) 6360,1874 6360,1857 ccw(c6365,1857) 6365,1852 ccw(c6365,1857) 6370,1857 6370,1874 cw(c6375,1874) 6375,1879 cw(c6375,1874) 6380,1874 6380,1850 6397.5,1832.5 6465.26,1832.5 v1(6562.76,1735)
DRAM_D6: U1.P3 U2.H7 | length 783.5
  Component Side w5: U1.P3@6116.93,1714.57 v1(6129.73,1727.36) ; U2.H7@6515.75,1562.01 6516.73,1562.01 6535.37,1580.64 v1(6536.45,1580.64)
  Inner Layer 2 w5: v1(6129.73,1727.36) 6147.4,1727.36 6169.5,1749.46 6169.5,1762.63 6192.37,1785.5 6205.5,1785.5 6210,1790 6210,1798.5 6215,1803.5 6265.82,1803.5 6287.32,1825 6362.27,1825 6394.5,1792.77 6394.5,1778.22 6459.72,1713 6472.86,1713 6528.36,1657.5 6544.37,1657.5 6567.5,1634.37 6567.5,1620.18 6547.32,1600 6495,1600 ccw(c6495,1595) 6490,1595 ccw(c6495,1595) 6495,1590 6530,1590 cw(c6530,1585) 6535,1585 6536.45,1583.55 v1(6536.45,1580.64)
DRAM_D7: U1.P4 U2.H8 | length 812.4
  Component Side w5: U1.P4@6091.34,1714.57 v1(6104.13,1727.36) ; U2.H8@6515.75,1530.51 6500,1546.26 6500,1575 6518.14,1593.14 6548.14,1593.14 6565,1610 v1(6575,1610)
  Inner Layer 2 w5: v1(6104.13,1727.36) 6104.13,1727.95 6116.63,1740.45 6134.9,1740.45 6142.23,1747.78 6142.23,1748.09 6142.82,1748.68 6142.82,1758.13 6150.14,1765.45 6159.59,1765.45 6206.64,1812.5 6262.09,1812.5 6283.59,1834 6366,1834 6403.5,1796.5 6403.5,1781.95 6463.45,1722 6476.59,1722 6516.09,1682.5 6540.18,1682.5 6547.5,1675.18 6547.5,1667.09 6576.5,1638.09 v1@6576.5,1610 ; v1(6575,1610) v1@6576.5,1610 ; v1(6575,1610) v1@6575.75,1609.25 ; v1(6575,1610) 6575,1608.5 v1@6575.75,1609.25 ; v1@6575.75,1609.25 v1@6576.5,1610 ; v1@6575.75,1609.25 6576.5,1608.5 v1@6576.5,1610
DRAM_D8: U1.F1 U2.D7 | length 790
  Component Side w5: U1.F1@6168.11,1509.84 6180.16,1509.84 6203.5,1486.5 6203.5,1466.5 v1(6225,1445) ; U2.D7@6641.73,1562.01 6658.46,1545.28 6658.46,1492.9 6667.5,1483.86 6667.5,1469.82 6660.18,1462.5 6659.82,1462.5 6647.32,1450 v1(6645,1450)
  Inner Layer 2 w5: v1(6225,1445) 6225,1435 cw(c6220,1435) 6220,1430 6205,1430 ccw(c6205,1425) 6200,1425 ccw(c6204.5,1425) 6204.5,1420.5 6274,1420.5 6280,1414.5 6293.5,1414.5 6305,1426 6318.5,1426 6330,1414.5 6343.5,1414.5 6355,1426 6368.5,1426 6380,1414.5 6394.5,1414.5 6405,1425 6420,1425 6430,1415 6445,1415 6456,1426 6468.5,1426 6480,1414.5 6493.5,1414.5 6505,1426 6521.32,1426 6543.82,1403.5 6578.05,1403.5 6590.05,1415.5 6610.5,1415.5 v1(6645,1450)
DRAM_D9: U1.F2 U2.C3 | length 797.6
  Component Side w5: U1.F2@6142.52,1509.84 v1(6155.32,1497.05) ; U2.C3@6673.23,1687.99 6687.15,1674.08 6687.15,1645 v1(6690,1645)
  Inner Layer 2 w5: v1(6155.32,1497.05) 6157.05,1497.05 ccw(c6157.05,1505) 6165,1505 6165,1508.64 cw(c6170,1508.64) 6170,1513.64 cw(c6170,1508.64) 6175,1508.64 6175,1500 ccw(c6180,1500) 6180,1495 ccw(c6180,1500) 6185,1500 6185,1508.64 cw(c6190,1508.64) 6190,1513.64 cw(c6190,1508.64) 6195,1508.64 6195,1505 ccw(c6198.86,1505) 6198.86,1501.14 6205,1501.14 cw(c6205,1496.14) 6210,1496.14 6210,1489.5 ccw(c6215,1489.5) 6215,1484.5 ccw(c6215,1489.5) 6220,1489.5 6220,1492.68 6237.82,1510.5 6462.63,1510.5 6504.09,1510.5 6521.09,1493.5 6576.18,1493.5 6687.5,1604.82 6687.5,1615 ccw(c6680,1615) 6680,1622.5 6677.5,1622.5 cw(c6677.5,1630) 6670,1630 cw(c6677.5,1630) 6677.5,1637.5 6682.5,1637.5 ccw(c6682.5,1645) v1(6690,1645) v1@6687.5,1642.5
DRAM_D10: U1.G3 U2.C8 | length 773.9
  Component Side w5: U1.G3@6116.93,1535.43 v1(6129.73,1522.64) ; v1(6665,1450) 6672.68,1450 6692.5,1469.82 6692.5,1480.18 6689.96,1482.72 6689.96,1513.78 U2.C8@6673.23,1530.51
  Inner Layer 2 w5: v1(6129.73,1522.64) 6142.82,1509.55 6142.82,1466.28 6169.09,1440 6185,1440 6190.26,1434.74 6190.26,1419.78 6204.09,1405.94 6204.09,1405 6219.59,1405 6226.09,1411.5 6243.91,1411.5 6249.91,1405.5 6529.09,1405.5 6540.09,1394.5 6581.78,1394.5 6593.78,1406.5 6621.5,1406.5 v1(6665,1450)
DRAM_D11: U1.E2 U2.A3 | length 794.4
  Component Side w5: U1.E2@6142.52,1484.25 v1(6155.32,1471.46) ; v1(6735,1665) 6736.22,1666.22 U2.A3@6736.22,1687.99
  Inner Layer 2 w5: v1@6156.77,1470 cw(c6156.77,1471.46) v1(6155.32,1471.46) 6161.46,1471.46 ccw(c6161.46,1475) 6165,1475 6165,1480 cw(c6170,1480) 6170,1485 cw(c6170,1480) 6175,1480 6175,1455 ccw(c6180,1455) 6180,1450 ccw(c6180,1455) 6185,1455 6185,1460 cw(c6191.5,1460) 6191.5,1466.5 6241.95,1466.5 6267.95,1492.5 6496.64,1492.5 6513.64,1475.5 6583.63,1475.5 6705.5,1597.37 6705.5,1614.64 6735,1644.14 v1(6735,1665)
DRAM_D12: U1.E4 U2.B8 | length 777.8
  Component Side w5: U1.E4@6091.34,1484.25 v1(6104.13,1471.46) ; U2.B8@6704.72,1530.51 6704.72,1530.28 v1(6720,1515)
  Inner Layer 2 w5: v1(6104.13,1471.46) 6117.23,1458.37 6134.9,1458.37 6170,1423.27 6170,1412.91 6175.73,1407.18 6186.08,1407.18 6203.27,1390 6217.32,1390 6229.82,1402.5 6240.18,1402.5 6246.31,1396.36 6246.45,1396.5 6525.37,1396.5 6536.37,1385.5 6585.5,1385.5 6597.5,1397.5 6630.18,1397.5 6720,1487.32 v1(6720,1515)
DRAM_D13: U1.D1 U2.A2 | length 788.7
  Component Side w5: U1.D1@6168.11,1458.66 6183.66,1458.66 6197.32,1445 v1(6200,1445) ; U2.A2@6736.22,1719.49 6735.51,1719.49 v1(6750,1705)
  Inner Layer 2 w5: v1(6200,1445) 6212.5,1457.5 6245.68,1457.5 6255.68,1467.5 6477.5,1467.5 6491,1454 6563.68,1454 6570.18,1447.5 6587.5,1447.5 6592.5,1452.5 6592.5,1471.64 6717.32,1596.46 6717.32,1613.73 6750,1646.41 v1(6750,1705)
DRAM_D14: U1.E1 U2.C2 | length 791.3
  Component Side w5: U1.E1@6168.11,1484.25 6185.75,1484.25 v1(6190,1480) ; U2.C2@6673.23,1719.49 v1(6690,1702.72)
  Inner Layer 2 w5: v1(6190,1480) 6194.5,1475.5 6238.22,1475.5 6264.22,1501.5 6500.37,1501.5 6517.37,1484.5 6579.91,1484.5 6696.5,1601.09 6696.5,1619.63 6720,1643.13 6720,1675 cw(c6725,1675) 6725,1680 6735,1680 ccw(c6735,1685) 6740,1685 ccw(c6735,1685) 6735,1690 6702.72,1690 cw(c6702.72,1702.72) v1(6690,1702.72)
DRAM_D15: U1.D2 U2.A7 | length 801.1
  Component Side w5: U1.D2@6142.52,1458.66 6156.38,1444.8 6182.53,1444.8 6207.32,1420 6260,1420 v1(6305,1375) ; U2.A7@6736.22,1562.01 6739.11,1559.11 v1(6755,1575)
  Inner Layer 2 w5: v1(6305,1375) 6521.41,1375 6528.91,1367.5 6612.91,1367.5 6755,1509.59 v1(6755,1575)
DRAM_D16: U1.Y4 U3.D7 | length 942.3
  Component Side w5: U1.Y4@6091.34,1868.11 6118.23,1895 6290,1895 6300,1885 6325,1885 6335,1895 6350,1895 6360,1885 6380,1885 6390,1895 6425,1895 6445,1875 v1(6445,1845)
  Inner Layer 2 w5: v1(6445,1845) 6445,1855 cw(c6455,1855) 6455,1865 cw(c6455,1860) 6460,1860 6460,1846.5 ccw(c6465,1846.5) 6465,1841.5 ccw(c6465,1846.5) 6470,1846.5 6470,1865 cw(c6475,1865) 6475,1870 cw(c6475,1865) 6480,1865 6480,1835 ccw(c6485,1835) 6485,1830 ccw(c6485,1835) 6490,1835 6490,1860 cw(c6495,1860) 6495,1865 cw(c6495,1860) 6500,1860 6500,1820 6603.5,1716.5 6603.5,1703.82 6619.82,1687.5 6642.5,1687.5 6657.32,1672.68 6657.32,1660 6665,1652.32 v1(6665,1650)
  Solder Side w5: U3.D7@6641.73,1687.99 6662.15,1667.58 6662.15,1652.86 v1(6665,1650)
DRAM_D17: U1.W4 U3.A7 | length 934.8
  Component Side w5: U1.W4@6091.34,1842.52 v1(6104.13,1855.32)
  Inner Layer 2 w5: v1(6104.13,1855.32) 6116.63,1867.82 6147.82,1867.82 6205,1925 6640,1925 cw(c6640,1920) 6645,1920 cw(c6640,1920) 6640,1915 6625,1915 ccw(c6625,1910) 6620,1910 ccw(c6625,1910) 6625,1905 6640,1905 cw(c6640,1900) 6645,1900 6645,1885 6729.77,1800.23 6730.18,1800.23 6737.5,1792.91 6737.5,1782.55 6736.22,1781.27 6736.22,1746.28 v1(6762.5,1720)
  Solder Side w5: U3.A7@6736.22,1687.99 6752.99,1687.99 6762.5,1697.5 v1(6762.5,1720)
DRAM_D18: U1.Y3 U3.A2 | length 952.7
  Component Side w5: U1.Y3@6116.93,1868.11 v1(6129.73,1880.91)
  Inner Layer 1 w5: v1(6129.73,1880.91) 6158.32,1909.5 6581.41,1909.5 6710,1780.91 6710,1755 6737,1728 6737,1693.41 6770,1660.41 v1(6770,1590)
  Solder Side w5: U3.A2@6736.22,1530.51 6770,1564.29 v1(6770,1590)
DRAM_D19: U1.U4 U3.B8 | length 952.8
  Component Side w5: U1.U4@6091.34,1791.34 v1(6104.13,1804.13)
  Inner Layer 2 w5: v1(6104.13,1804.13) 6117.23,1817.23 6117.23,1834.9 6124.55,1842.23 6137.23,1842.23 6211,1916 6596.73,1916 6644.74,1867.99 6644.74,1815 ccw(c6650,1815) 6650,1809.74 ccw(c6650,1814.74) 6655,1814.74 ; 6655,1815 6655,1835 cw(c6660,1835) 6660,1840 cw(c6660,1835) 6665,1835 6665,1800 6677.27,1787.73 v1(6725,1787.73)
  Solder Side w5: U3.B8@6704.72,1719.49 6720,1734.76 6740.88,1734.76 6753.62,1747.5 6753.62,1756.38 6725,1785 v1(6725,1787.73)
DRAM_D20: U1.W3 U3.A3 | length 935.8
  Component Side w5: U1.W3@6116.93,1842.52 v1(6129.73,1855.32)
  Inner Layer 1 w5: v1(6129.73,1855.32) 6155.32,1855.32 ccw(c6155.32,1865) 6165,1865 6165,1890.59 cw(c6174.91,1890.59) 6174.91,1900.5 6184.5,1900.5 6195,1890 6205,1890 6215,1900 6225,1900 6235,1890 6245,1890 6255.5,1900.5 6577.68,1900.5 6701,1777.18 6701,1751.27 6728,1724.27 6728,1689.68 6750,1667.68 v1(6750,1595)
  Solder Side w5: U3.A3@6736.22,1562.01 6736.22,1582.01 6749.21,1595 v1(6750,1595)
DRAM_D21: U1.Y2 U3.C3 | length 935.9
  Component Side w5: U1.Y2@6142.52,1868.11 6159.41,1885 6235,1885 v1(6245,1875)
  Inner Layer 1 w5: v1(6245,1875) 6261.5,1891.5 6573.96,1891.5 6692,1773.46 6692,1747.54 6719,1720.54 6719,1676.41 6721.5,1673.91 6721.5,1648.09 ccw(c6729.59,1648.09) 6729.59,1640 6735,1640 cw(c6735,1635) 6740,1635 cw(c6735,1635) 6735,1630 6710,1630 ccw(c6710,1625) 6705,1625 ccw(c6710,1625) 6710,1620 6725,1620 cw(c6725,1615) 6730,1615 v1(6730,1605)
  Solder Side w5: U3.C3@6673.23,1562.01 6682.01,1562.01 6725,1605 v1(6730,1605)
DRAM_D22: U1.T4 U3.C8 | length 938.9
  Component Side w5: U1.T4@6091.34,1765.75 v1(6104.13,1778.54)
  Inner Layer 2 w5: v1(6104.13,1778.54) 6117.23,1791.63 6134.9,1791.63 6142.82,1799.55 6142.82,1834.9 6214.91,1907 6593,1907 6615,1885 6615,1880 cw(c6610,1880) 6610,1875 6600,1875 ccw(c6600,1870) 6595,1870 ccw(c6600,1870) 6600,1865 6630,1865 cw(c6630,1860) 6635,1860 cw(c6630,1860) 6630,1855 6600,1855 ccw(c6600,1850) 6595,1850 ccw(c6600,1850) 6600,1845 6610,1845 cw(c6610,1840) 6615,1840 v1(6615,1800)
  Solder Side w5: v1(6615,1800) 6650,1800 6689.96,1760.04 6689.96,1744.87 6690,1744.82 6690,1736.26 U3.C8@6673.23,1719.49
DRAM_D23: U1.W2 U3.C2 | length 949.2
  Component Side w5: U1.W2@6142.52,1842.52 6153.94,1853.94 6218.54,1853.94 6227.12,1862.53 6239.8,1862.53 ; 6239.82,1862.5 6262.5,1862.5 v1(6270,1870)
  Inner Layer 1 w5: v1(6270,1870) 6282.5,1882.5 6570.23,1882.5 6683,1769.73 6683,1743.82 6710,1716.82 6710,1672.68 6712.5,1670.18 6712.5,1649.82 6695,1632.32 6695,1585 cw(c6690,1585) 6690,1580 cw(c6690,1585) 6685,1585 6685,1600 ccw(c6675,1600) v1(6675,1610) v1@6675,1612.32
  Solder Side w5: U3.C2@6673.23,1530.51 6658.46,1545.28 6658.46,1580.78 6675,1597.32 v1(6675,1610)
DRAM_D24: U1.D3 U3.E3 | length 888.5
  Component Side w5: U1.D3@6116.93,1458.66 v1(6129.73,1445.87)
  Inner Layer 2 w5: v1(6129.73,1445.87) 6117.23,1433.37 6117.23,1362.77 6130,1350 6255,1350 ccw(c6255,1355) 6260,1355 ccw(c6255,1355) 6255,1360 6240,1360 cw(c6240,1365) 6235,1365 cw(c6240,1365) 6240,1370 6280,1370 ccw(c6280,1375) 6285,1375 6285,1382.5 cw(c6290,1382.5) 6290,1387.5 6521.64,1387.5 6532.64,1376.5 6596.5,1376.5 v1(6605,1385)
  Solder Side w5: v1(6605,1385) 6620,1385 6632.5,1397.5 6632.5,1482.5 6625,1490 6625,1505.13 6625,1524.39 6625,1547.24 U3.E3@6610.24,1562.01